# Altium PCB FPC test - connector side.PcbDoc
Units mm, origin at the board's own origin, x right, y up, seen from the top; angles counter-clockwise.
Board outline 20 x 52 mm, 2 copper layers (Top Layer, Bottom Layer), stack 1.569 mm thick; 3 components, 20 nets, 80 pads, 0 vias.
Unrouted connection lines stored in the file: 7.
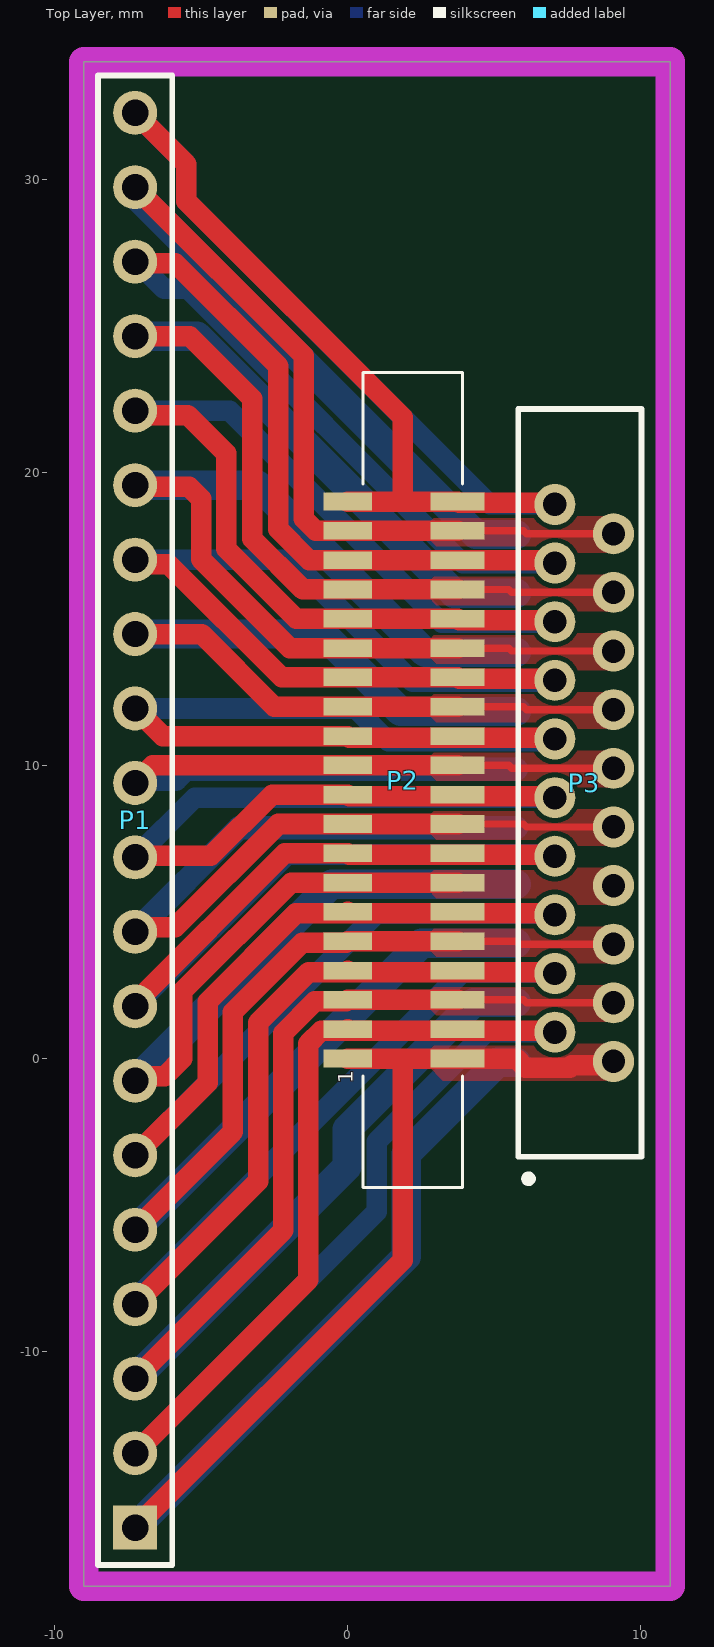
[diagram p0: Top Layer view]
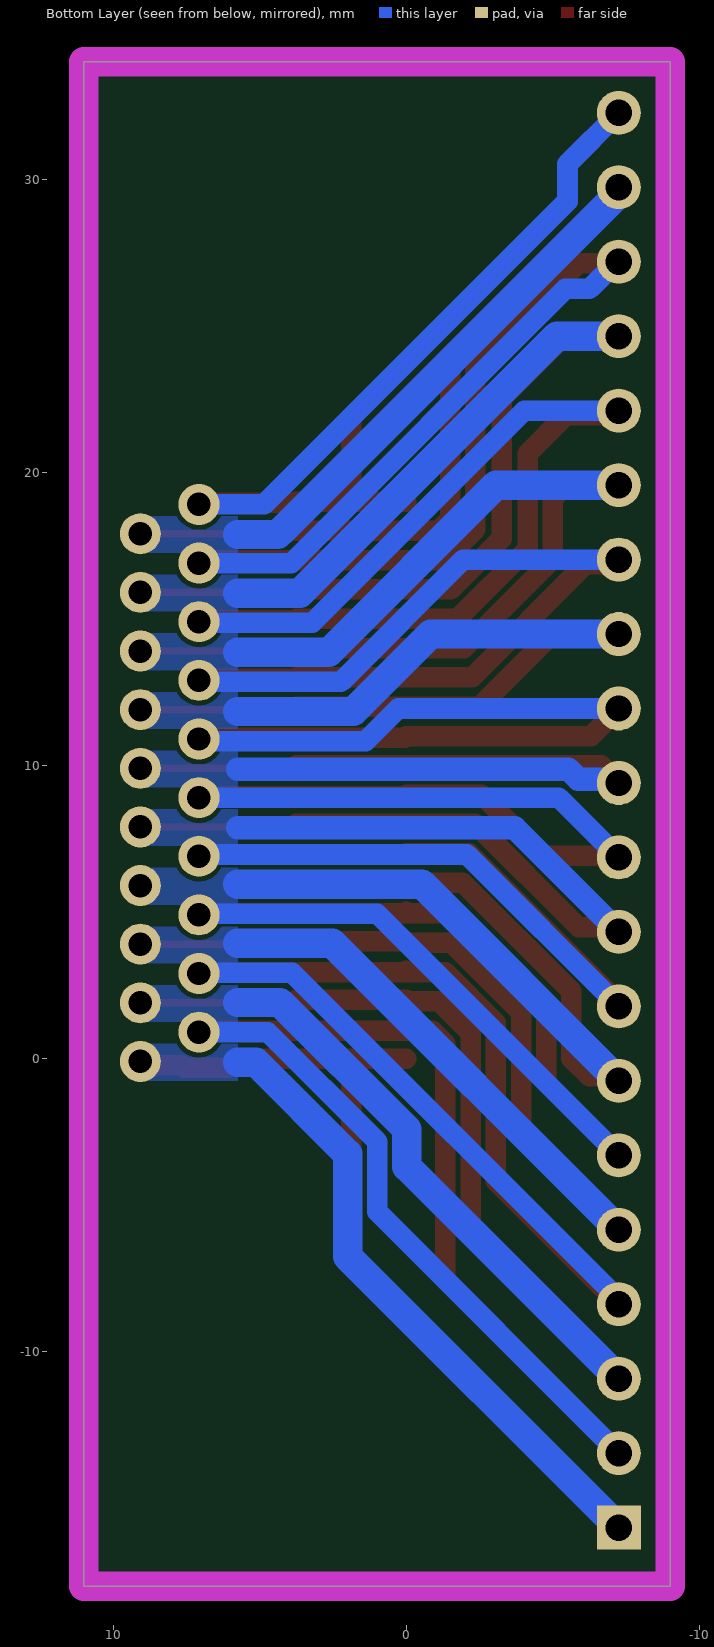
[diagram p1: Bottom Layer view, seen from below]

## Layer stack, top to bottom
Top Solder: solder mask 0.0254, SM-001, Dk 4
Top Layer: signal copper 0.035
Dielectric 1: core 1.4986, Core-043, Dk 4.3
Bottom Layer: signal copper 0.035
Bottom Solder: solder mask 0.0254, SM-001, Dk 4

## Board outline
-9,-18 11,-18 11,34 -9,34

## Design rules (kind name [scope] priority, off if disabled: settings)
Clearance [All] p1: gap=0.16 ignorepadtopadclearanceinfootprint=FALSE
PolygonConnect [All] p1: connectstyle=Direct reliefconductorwidth=0.254 reliefentries=4 polygonreliefangle="90 Angle" airgapwidth=0.254
RoutingVias [All] p1: holewidth=0.711 width=1.27 viastyle="Through Hole" minholewidth=0.711 minwidth=1.27 maxholewidth=0.711 maxwidth=1.27
SolderMaskExpansion [All] p1: expansion=0.102 istentingtop=FALSE
Width [All] p1: maxlimit=1 minlimit=0.152 preferedwidth=0.7
30 further rules are at their usual default settings.

## Components (designator, comment, footprint, x,y, rotation, side; value= is the part's Value field where it differs from the comment)
P1 "Header 20" HDR1X20 -7.25,-16 r90 top
P2 "Header 20" 2-1734248-0 3.725,0 r270 top
P3 "Header 20" SLW16S-1C7LF 7.92,9.4 r90 top

## Footprints (in the part's own frame and the unit in brackets; to place one, negate y for a bottom-side part, rotate by r counter-clockwise, add the part's x,y. Pads: shape width x height; smd on the part's side, far side on the other; paste and mask are expansions set on the pad)
2-1734248-0 [mm] "TE Connectivity: FPC Connectors, Flex-to-Board, 20 Position, 1mm [.039in] Centerline, Zero Insertion Force (ZIF), Vertical, Surface Mount"
  rect 0.6x1.85 smd: 1(0,0.025) 2(-1,0.025) 3(-2,0.025) 4(-3,0.025) 5(-4,0.025) 6(-5,0.025) 7(-6,0.025) 8(-7,0.025) 9(-8,0.025) 10(-9,0.025) 11(-10,0.025) 12(-11,0.025) 13(-12,0.025) 14(-13,0.025) 15(-14,0.025) 16(-15,0.025) 17(-16,0.025) 18(-17,0.025) 19(-18,0.025) 20(-19,0.025)
  rect 0.6x1.65 smd: 1(0,-3.725) 2(-1,-3.725) 3(-2,-3.725) 4(-3,-3.725) 5(-4,-3.725) 6(-5,-3.725) 7(-6,-3.725) 8(-7,-3.725) 9(-8,-3.725) 10(-9,-3.725) 11(-10,-3.725) 12(-11,-3.725) 13(-12,-3.725) 14(-13,-3.725) 15(-14,-3.725) 16(-15,-3.725) 17(-16,-3.725) 18(-17,-3.725) 19(-18,-3.725) 20(-19,-3.725)
  silkscreen extent -23.4,-3.2 4.4,0.2
HDR1X20 [mm] "Connector; Header; 20 Position"
  rect 1.5x1.5 hole 0.9: 1(0,0)
  round 1.5 hole 0.9: 2(2.54,0) 3(5.08,0) 4(7.62,0) 5(10.16,0) 6(12.7,0) 7(15.24,0) 8(17.78,0) 9(20.32,0) 10(22.86,0) 11(25.4,0) 12(27.94,0) 13(30.48,0) 14(33.02,0) 15(35.56,0) 16(38.1,0) 17(40.64,0) 18(43.18,0) 19(45.72,0) 20(48.26,0)
  silkscreen extent -1.27,-1.27 49.53,1.27
SLW16S-1C7LF [mm] "CONN FFC FPC VERT 16POS 1MM PCB"
  round 1.4 hole 0.8: 1(-8.5,0.85) 2(-9.5,-1.15) 3(-6.5,0.85) 4(-7.5,-1.15) 5(-4.5,0.85) 6(-5.5,-1.15) 7(-2.5,0.85) 8(-3.5,-1.15) 9(-0.5,0.85) 10(-1.5,-1.15) 11(1.5,0.85) 12(0.5,-1.15) 13(3.5,0.85) 14(2.5,-1.15) 15(5.5,0.85) 16(4.5,-1.15) 17(7.5,0.85) 18(6.5,-1.15) 19(9.5,0.85) 20(8.5,-1.15)
  silkscreen extent -13.62,-2.1 12.75,2.1, body extent -13.1,-2 13.1,2, height 5

## Part data
P1 P2 P3: "Header, 20-Pin", LatestRevisionDate=17-Jul-2002, LatestRevisionNote="Re-released for DXP Platform.", Publisher="Altium Limited"

## Nets (pads, with @x,y where several pads share a name; then routed paths per layer and width w, separated by ;. In a path a pad name is that pad's centre, name@x,y a point inside that pad or via, vN(x,y) a via of type N, cw(c..) or ccw(c..) an arc to the next point about the centre after c; other vN are vias at no path point)
NetP1_1: P1.1 P2.1 P3.2 | length 50.7
  Top Layer w0.7: P1.1 1.875,-6.875 1.875,0 ; P2.1@0,0 1.875,0 ; P3.2 8.936,-0.234 7.647,-0.234 7.571,-0.31 6.06,-0.31 5.75,0 3.75,0 1.875,0
  Bottom Layer w1: P1.1 2,-6.75 2,-3.25 5.125,-0.125 5.75,-0.125
NetP1_2: P1.2 P2.2 P3.1 | length 46.7
  Top Layer w0.7: P1.2 -1.335,-7.545 -1.335,0.511 -0.896,0.95 -0.05,0.95 0,1 0.05,0.95 7.02,0.95 P3.1
  Bottom Layer w0.7: P1.2 0.99,-5.22 0.99,-2.832 4.722,0.9 P3.1
NetP1_3: P1.3 P2.3 P3.4 | length 44.7
  Top Layer w0.25: P2.3@3.75,2 6,2 6.1,1.9 P3.4
  Top Layer w0.7: P1.3 -2.195,-5.865 -2.195,0.867 -1.112,1.95 -0.05,1.95 0,2 P2.3@3.75,2
  Bottom Layer w1: P1.3 -0.02,-3.69 -0.02,-2.413 4.303,1.91 5.75,1.91
NetP1_4: P1.4 P2.4 P3.3 | length 41.3
  Top Layer w0.7: P1.4 -3.055,-4.185 -3.055,1.224 -1.329,2.95 -0.05,2.95 0,3 0.05,2.95 7.02,2.95 P3.3
  Bottom Layer w0.7: P1.4 -7.25,-8.215 3.885,2.92 7.05,2.92 P3.3
NetP1_5: P1.5 P2.5 P3.6 | length 39.9
  Top Layer w0.25: P2.5@3.75,4 5.75,4 5.85,3.9 P3.6
  Top Layer w0.7: P1.5 -3.915,-2.505 -3.915,1.58 -1.545,3.95 -0.05,3.95 0,4 P2.5@3.75,4
  Bottom Layer w1: P1.5 2.52,3.93 5.75,3.93
NetP1_6: P1.6 P2.6 P3.5 | length 37.2
  Top Layer w0.7: P1.6 -4.775,-0.825 -4.775,1.936 -1.761,4.95 -0.05,4.95 0,5 0.05,4.95 7.02,4.95 P3.5
  Bottom Layer w0.7: P1.6 0.99,4.94 7.03,4.94 P3.5
NetP1_7: P1.7 P2.7 P3.8 | length 30.9
  Top Layer w0.7: P1.7 -7.097,-0.607 -6.242,-0.607 -5.635,0 -5.635,2.292 -1.927,6 0,6 P2.7@3.75,6
  Bottom Layer w1: P1.7 -0.54,5.95 5.75,5.95
NetP1_8: P1.8 P2.8 P3.7 | length 33.1
  Top Layer w0.7: P1.8 -7.25,1.894 -2.144,7 0,7 0.05,6.95 7.02,6.95 P3.7
  Bottom Layer w0.7: P1.8 -2.07,6.96 7.01,6.96 P3.7
NetP1_9: P1.9 P2.9 P3.10 | length 32.4
  Top Layer w0.25: P2.9@3.75,8 6,8 6.1,7.9 P3.10
  Top Layer w0.7: P1.9 -7.097,4.473 -5.887,4.473 -2.36,8 0,8 P2.9@3.75,8
  Bottom Layer w0.8: P1.9 -3.695,7.875 5.75,7.875
NetP1_10: P1.10 P2.10 P3.9 | length 30.4
  Top Layer w0.7: P1.10 -7.197,6.913 -4.663,6.913 -2.576,9 0,9 0.05,8.95 7.02,8.95 P3.9
  Bottom Layer w0.7: P1.10 -5.21,8.9 P3.9
NetP1_11: P1.11 P2.11 P3.12 | length 17.9
  Top Layer w0.25: P2.11@4.385,10 5.5,10 5.6,9.9 P3.12
  Bottom Layer w0.8: P1.11 -7.116,9.534 -5.863,9.534 -5.522,9.875 5.75,9.875
NetP1_12: P1.12 P2.12 P3.11 | length 21.9
  Top Layer w0.7: P2.12@0,11 0.05,10.95 7.02,10.95 P3.11
  Bottom Layer w0.7: P1.12 0.275,11.94 1.39,10.825 6.995,10.825 P3.11
NetP1_13: P1.13 P2.13 P3.14 | length 31.5
  Top Layer w0.25: P2.13@3.75,12 6,12 6.1,11.9 P3.14
  Top Layer w0.7: P1.13 -4.98,14.48 -2.5,12 0,12 P2.13@3.75,12
  Bottom Layer w1: P1.13 -0.837,14.48 1.808,11.835 5.75,11.835
NetP1_14: P1.14 P2.14 P3.13 | length 32.1
  Top Layer w0.7: P1.14 -7.097,16.867 -6.117,16.867 -2.25,13 0,13 3.75,13 3.8,12.95 7.02,12.95 P3.13
  Bottom Layer w0.7: P1.14 -1.948,17.02 2.227,12.845 7.015,12.845 P3.13
NetP1_15: P1.15 P2.15 P3.16 | length 35.2
  Top Layer w0.25: P2.15@3.75,14 5.5,14 5.6,13.9 P3.16
  Top Layer w0.7: P1.15 -7.19,19.5 -5.41,19.5 -5,19.09 -5,17.034 -1.966,14 0,14 P2.15@3.75,14
  Bottom Layer w1: P1.15 -3.06,19.56 2.645,13.855 5.75,13.855
NetP1_16: P1.16 P2.16 P3.15 | length 36.5
  Top Layer w0.7: P1.16 -7.1,21.95 -5.45,21.95 -4.14,20.64 -4.14,17.39 -1.75,15 0,15 3.75,15 3.8,14.95 7.02,14.95 P3.15
  Bottom Layer w0.7: P1.16 -4.028,22.1 3.207,14.865 7.035,14.865 P3.15
NetP1_17: P1.17 P2.17 P3.18 | length 39.4
  Top Layer w0.25: P2.17@3.75,16 5.5,16 5.6,15.9 P3.18
  Top Layer w0.7: P1.17 -5.39,24.64 -3.25,22.5 -3.25,17.728 -1.522,16 0,16 P2.17@3.75,16
  Bottom Layer w1: P1.17 -5.14,24.64 3.625,15.875 5.75,15.875
NetP1_18: P1.18 P2.18 P3.17 | length 31.9
  Top Layer w0.7: P1.18 -7.197,27.127 -5.877,27.127 -2.36,23.61 -2.36,18.054 -1.356,17.05
  Bottom Layer w0.7: P1.18 -7.18,27.18 -6.25,26.25 -5.428,26.25 3.922,16.9 P3.17
NetP1_19: P1.19 P2.19 P3.20 | length 20.1
  Top Layer w0.25: P2.19@4.385,18 6,18 6.1,17.9 P3.20
  Top Layer w0.7: P1.19 -1.5,23.97 -1.5,18.41 -1.09,18 P2.19@0,18
NetP1_20: P1.20 P2.20 P3.19 | length 3.4
  Top Layer w0.7: P2.20@3.75,19 3.8,18.95 7.02,18.95 P3.19
copper on no net: | length 90.2
  Top Layer w0.7: -7.25,9.4 -6.65,10 3.75,10 ; -7.25,11.94 -6.31,11 0,11 ; -7.25,32.26 -5.5,30.51 -5.5,29.25 1.875,21.875 1.875,19.875 1.875,19 ; -1.356,17.05 -1.306,17 3.75,17 6.97,17 ; 0,18 3.75,18 ; 0,19 1.875,19 ; 3.75,19 1.875,19
  Bottom Layer w0.7: -7.25,32.26 -5.5,30.51 -5.5,29.25 4.85,18.9 7.07,18.9 ; 4.25,18 4.375,17.875
  Bottom Layer w1: -7.25,29.5 4.25,18 ; 4.375,17.875 5.75,17.875

## Polygon pours and split planes (outlines as drawn)
no net on Top Layer "NONET_L01_P005" (solid, pour order 5): 9,9.25 3.25,9.25 2.75,9.75 2.75,10.25 3,10.5 9,10.5
no net on Top Layer "NONET_L01_P004" (solid, pour order 4): 9,7.25 3.25,7.25 2.75,7.75 2.75,8.25 3,8.5 9,8.5
NetP1_7 on Top Layer "NETP1_7_L01_P003" (solid, pour order 3): 9,5.25 3.25,5.25 2.75,5.75 2.75,6.25 3,6.5 9,6.5
NetP1_5 on Top Layer "NETP1_5_L01_P002" (solid, pour order 2): 2.75,4.25 3,4.5 9,4.5 9,3.25 3.25,3.25 2.75,3.75
NetP1_3 on Top Layer "NETP1_3_L01_P001" (solid, pour order 1): 2.75,2.25 2.75,1.75 3.25,1.25 9,1.25 9,2.5 3,2.5
no net on Top Layer "NONET_L01_P006" (solid, pour order 6): 9,11.25 3.25,11.25 2.75,11.75 2.75,12.25 3,12.5 9,12.5
no net on Top Layer "NONET_L01_P009" (solid, pour order 9): 9,17.25 3.25,17.25 2.75,17.75 2.75,18.25 3,18.5 9,18.5
no net on Top Layer "NONET_L01_P008" (solid, pour order 8): 9,15.25 3.25,15.25 2.75,15.75 2.75,16.25 3,16.5 9,16.5
no net on Top Layer "NONET_L01_P007" (solid, pour order 7): 9,13.25 3.25,13.25 2.75,13.75 2.75,14.25 3,14.5 9,14.5
NetP1_1 on Top Layer "NETP1_1_L01_P000" (solid, pour order 0): 2.75,0.25 3,0.5 9,0.5 9,-0.75 3.25,-0.75 2.75,-0.25
no net on Bottom Layer "NONET_L02_P016" (solid, pour order 16): 9,9.25 5.75,9.25 5.75,10.5 9,10.5
no net on Bottom Layer "NONET_L02_P015" (solid, pour order 15): 9,7.25 5.75,7.25 5.75,8.5 9,8.5
no net on Bottom Layer "NONET_L02_P020" (solid, pour order 20): 9,17.25 5.75,17.25 5.75,18.5 9,18.5
no net on Bottom Layer "NONET_L02_P019" (solid, pour order 19): 9,15.25 5.75,15.25 5.75,16.5 9,16.5
no net on Bottom Layer "NONET_L02_P018" (solid, pour order 18): 9,13.25 5.75,13.25 5.75,14.5 9,14.5
no net on Bottom Layer "NONET_L02_P017" (solid, pour order 17): 9,11.25 5.75,11.25 5.75,12.5 9,12.5
no net on Bottom Layer "NONET_L02_P014" (solid, pour order 14): 9,5.25 5.75,5.25 5.75,6.5 9,6.5
no net on Bottom Layer "NONET_L02_P013" (solid, pour order 13): 9,3.25 5.75,3.25 5.75,4.5 9,4.5
no net on Bottom Layer "NONET_L02_P012" (solid, pour order 12): 9,1.25 5.75,1.25 5.75,2.5 9,2.5
NetP1_1 on Bottom Layer "NETP1_1_L02_P011" (solid, pour order 11): 9,-0.75 5.75,-0.75 5.75,0.5 9,0.5

## Keep-outs
Keep-Out Layer:
  the board outline again, w1

## Text inside footprints (layer, text, board x,y; h text height)
P2: Top Overlay "1" at 0.175,-0.85 h0.5 r90